# Altium PCB AngleMod V1.PcbDoc
Units mm, origin at the board's own origin, x right, y up, seen from the top; angles counter-clockwise.
Board outline 15.2 x 15.2 mm, 2 copper layers (Top Layer, Bottom Layer), stack 0.67 mm thick; 25 components, 26 nets, 100 pads, 41 vias.
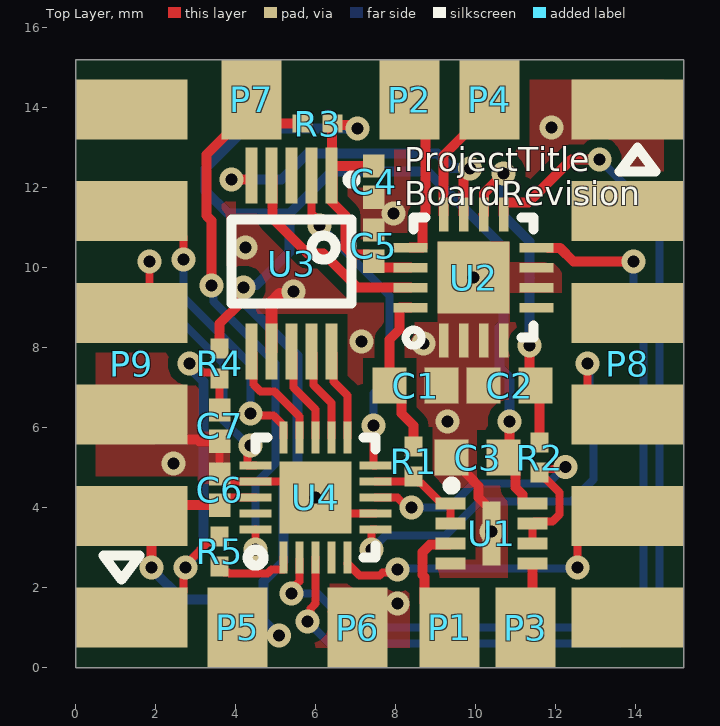
[diagram p0: Top Layer view]
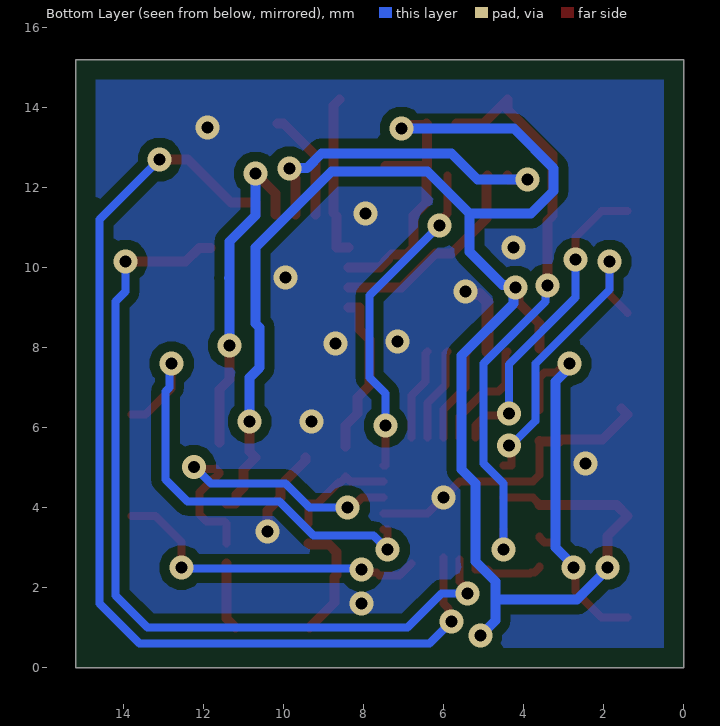
[diagram p1: Bottom Layer view, seen from below]

## Layer stack, top to bottom
Top Solder: solder mask 0.0254, SM-001, Dk 4
Top Layer: signal copper 0.035
Dielectric 1: core 0.6, Core-038, Dk 4.6
Bottom Layer: signal copper 0.035
Bottom Solder: solder mask 0.0254, SM-001, Dk 4

## Board outline
0,0 0,15.2 15.2,15.2 15.2,0

## Design rules (kind name [scope] priority, off if disabled: settings)
BoardOutlineClearance [All] p1 off: gap=0.7 ignorepadtopadclearanceinfootprint=FALSE
Clearance Polygon_Clearance [InPolygon] p1: gap=0.25 ignorepadtopadclearanceinfootprint=FALSE
Clearance [All] p2: gap=0.2 ignorepadtopadclearanceinfootprint=FALSE
ComponentClearance [All] p1: gap=0.2 collisioncheckmode=3 verticalgap=0.254 showdistances=FALSE
Height [All] p1 off: minheight=0 maxheight=25.4 prefheight=12.7
HoleSize [All] p1: absolutevalues=TRUE maxlimit=0.3 minlimit=0.3 maxpercent=80.000 minpercent=20.000
HoleToHoleClearance [All] p1: gap=0.5 allowstackedmicrovias=TRUE
MinimumSolderMaskSliver [All] p1: minsoldermaskwidth=0.08
PolygonConnect [All] p1: connectstyle=Direct reliefconductorwidth=0.254 reliefentries=4 polygonreliefangle="90 Angle" airgapwidth=0.254
RoutingVias [All] p1: holewidth=0.3 width=0.6 viastyle="Through Hole" minholewidth=0.3 minwidth=0.6 maxholewidth=0.3 maxwidth=0.6
SilkToSolderMaskClearance [IsPad] p1 off: minsilkscreentomaskgap=0.254 clearancetoexposedcopper=TRUE
SolderMaskExpansion [All] p1: expansion=0.055 istentingtop=FALSE soldermaskfromhole=TRUE
Width [All] p1: maxlimit=0.5 minlimit=0.2 preferedwidth=0.25
24 further rules are at their usual default settings.

## Components (designator, comment, footprint, x,y, rotation, side; value= is the part's Value field where it differs from the comment)
C1 "CC0603KRX7R6BB224" CX7R0603K 8.5,7.05 r180 top value=220nF
C2 "CC0603KRX7R6BB224" CX7R0603K 10.85,7.05 r0 top value=220nF
C3 "06036C105JAT2A" CX7R0603K 10.05,5.25 r0 top value=1uF
C4 "04025C104JAT2A" CX7R0402C 7.45,12.15 r90 top value=100nF
C5 "04025C104JAT2A" CX7R0402C 7.45,10.55 r270 top value=100nF
C6 "04025C104JAT2A" CX7R0402C 3.6,4.45 r270 top value=100nF
C7 "04025C104JAT2A" CX7R0402C 3.6,6.05 r90 top value=10nF
P1 "SMD Pad 1 pin" PAD_2X1.5_SQUARE 9.35,1 r90 top
P2 "SMD Pad 1 pin" PAD_2X1.5_SQUARE 8.35,14.2 r90 top
P3 "SMD Pad 1 pin" PAD_2X1.5_SQUARE 11.25,1 r90 top
P4 "SMD Pad 1 pin" PAD_2X1.5_SQUARE 10.35,14.2 r90 top
P5 "SMD Pad 1 pin" PAD_2X1.5_SQUARE 4.05,1 r90 top
P6 "SMD Pad 1 pin" PAD_2X1.5_SQUARE 7.05,1 r90 top
P7 "SMD Pad 1 pin" PAD_2X1.5_SQUARE 4.4,14.2 r270 top
P8 "TSW-106-23-F-S" TSW-106-23-F-S_SIDEA 13.8,7.6 r270 top
P9 "TSW-106-23-F-S" TSW-106-23-F-S_SIDEA 1.4,7.6 r90 top
R1 "RG1005P-472-B-T5" RT0402_C 8.45,5.15 r270 top value=4.7k
R2 "RG1005P-472-B-T5" RT0402_C 11.6,5.25 r270 top value=4.7k
R3 "TBD" RT0402_C 6.05,13.6 r0 top value=10k
R4 "TBD" RT0402_C 3.6,7.6 r90 top value=10k
R5 "TBD" RT0402_C 3.6,2.9 r90 top value=470E
U1 "TSV632IQ2T" DFN-8_2X2_0.5_C 10.4,3.35 r0 top
U2 "NX3L4053HR,115" HXQFN-16_SOT-1039-2_C 9.95,9.75 r90 top
U3 "MCP48FVB12-E/UN" MSOP-10_0.5_C 5.4,10.1 r270 top
U4 "PIC16F15245T-I/REB" VQFN-20_0.4_C 6,4.25 r90 top

## Footprints (in the part's own frame and the unit in brackets; to place one, negate y for a bottom-side part, rotate by r counter-clockwise, add the part's x,y. Pads: shape width x height; smd on the part's side, far side on the other; paste and mask are expansions set on the pad)
CX7R0402C [mm] "Chip Capacitor, 2-Leads, Body 1.00x0.50mm, IPC High Density"
  rect 0.58x0.54 smd: 1(-0.39,0) 2(0.39,0)
  body extent -0.55,-0.3 0.55,0.3, height 0.56
CX7R0603K [mm] "Chip Capacitor, 2-Leads, Body 1.60x0.81mm, IPC High Density"
  rect 0.85x0.9 smd: 1(-0.65,0) 2(0.65,0)
  body extent -0.88,-0.48 0.87,0.48, height 1.02
DFN-8_2X2_0.5_C [mm]
  rect 0.75x0.3 smd: 1(-1.025,0.75) 2(-1.025,0.25) 3(-1.025,-0.25) 4(-1.025,-0.75) 5(1.025,-0.75) 6(1.025,-0.25) 7(1.025,0.25) 8(1.025,0.75)
  rect 0.45x1.6 smd: EP(0,0)
  silkscreen extent -1.1,1.1 -0.9,1.3, body extent -1,-1 1,1, height 0.6
HXQFN-16_SOT-1039-2_C [mm] "HXQFN16 (U) plastic thermal enhanced extremely thin quad  flat package; no leads; 16 terminals, 0.5 mm pitch, 3 mm x 3  mm x 0.5 mm body"
  rect 0.85x0.24 smd paste-0.012: 1(-1.575,0.75) 2(-1.575,0.25) 3(-1.575,-0.25) 4(-1.575,-0.75) 9(1.575,-0.75) 10(1.575,-0.25) 11(1.575,0.25) 12(1.575,0.75)
  rect 0.24x0.85 smd paste-0.012: 5(-0.75,-1.575) 6(-0.25,-1.575) 7(0.25,-1.575) 8(0.75,-1.575) 13(0.75,1.575) 14(0.25,1.575) 15(-0.25,1.575) 16(-0.75,1.575)
  rect 1.8x1.8 smd paste-0.5: EP(0,0)
  silkscreen extent -1.7,-1.5 1.5,1.7, body extent -1.5,-1.5 1.5,1.5, height 0.5
MSOP-10_0.5_C [mm]
  rect 1.4x0.3 smd: 1(-2.2,1) 2(-2.2,0.5) 3(-2.2,0) 4(-2.2,-0.5) 5(-2.2,-1) 6(2.2,-1) 7(2.2,-0.5) 8(2.2,0) 9(2.2,0.5) 10(2.2,1)
  silkscreen extent -2.2,-1.5 1,1.6, body extent -1.5,-1.5 1.5,1.5, height 1.1
PAD_2X1.5_SQUARE [mm]
  rect 2x1.5 smd paste-5: 1(0,0)
RT0402_C [mm] "Chip Resistor, 2-Leads, Body 1.00x0.50mm, IPC High Density"
  rect 0.5x0.45 smd: 1(-0.375,0) 2(0.375,0)
  body extent -0.53,-0.27 0.53,0.28, height 0.4
TSW-106-23-F-S_SIDEA [mm] "Connector Header Through Hole 6 position 0.100\" (2.54mm)"
  rect 1.5x2.8 smd paste-5: 1(-6.35,0) 2(-3.81,0) 3(-1.27,0) 4(1.27,0) 5(3.81,0) 6(6.35,0)
  silkscreen extent -5.4,-0.2 -4.8,0.7, body extent -7.75,-1.21 7.62,10.1, height 1.62
VQFN-20_0.4_C [mm]
  rect 0.8x0.2 smd: 1(-1.5,0.8) 2(-1.5,0.4) 3(-1.5,0) 4(-1.5,-0.4) 5(-1.5,-0.8) 11(1.5,-0.8) 12(1.5,-0.4) 13(1.5,0) 14(1.5,0.4) 15(1.5,0.8)
  rect 0.2x0.8 smd: 6(-0.8,-1.5) 7(-0.4,-1.5) 8(0,-1.5) 9(0.4,-1.5) 10(0.8,-1.5) 16(0.8,1.5) 17(0.4,1.5) 18(0,1.5) 19(-0.4,1.5) 20(-0.8,1.5)
  rect 1.8x1.8 smd: EP(0,0)
  silkscreen extent -1.7,-1.5 1.5,1.7, body extent -1.5,-1.5 1.5,1.5, height 0.9

## Part data
C1 C2: library part kyocera-C-X7R-0603, "0.22 µF ±10% 10V Ceramic Capacitor X7R 0603 (1608 Metric)", Value2=10V, Size=0603, Type=CC0603KRX7R6BB224
C3: library part kyocera-C-X7R-0603, "SMD Capacitor", CapacitanceCode=105, Dielectric=C, ToleranceCode=J, Value2=6.3V, VoltageCode=6, MaxThicknessCode=K, Size=0603
C4 C5 C6 C7: library part kyocera-C-X7R-0402, "SMD Capacitor", CapacitanceCode=104, Dielectric=C, ToleranceCode=J, Value2=50V, VoltageCode=5, MaxThicknessCode=E, Size=0402
P1 P2 P3 P4 P5 P6 P7: "Single SMD Pad"
  P1: Name="X Axis In"
  P2: Name="X Axis Out"
  P3: Name="Y Axis In"
  P4: Name="Y Axis Out"
  P5: Name=3.3V
  P6: Name=GND
  P7: Name=Button
P8 P9: "Connector Header Through Hole 6 position 0.100\" (2.54mm)", Manufacturer 1="Samtec Inc.", Manufacturer Part Number 1=TSW-106-23-F-S, Type=TSW-106-23-F-S
R1 R2 R3 R4 R5: library part RT0402DRD0747KL, "4.7 kOhms ±0.1% 0.063W, 1/16W Chip Resistor 0402 (1005 Metric) Anti-Sulfur, Automotive AEC-Q200 Thin Film", Value2=62.5mW
  R1 R2: Type=RG1005P-472-B-T5
  R3 R4 R5: Type=TBD
U1: "General Purpose Amplifier 2 Circuit Rail-to-Rail 8-DFN (2x2)", Manufacturer 1=STMicroelectronics, Manufacturer Part Number 1=TSV632IQ2T, Type=TSV632IQ2T
U2: library part NX3L4053, "3 Circuit IC Switch 2:1 800mOhm 16-HXQFN (3x3)", Manufacturer Part Number 1="NXP USA Inc.", Manufacturer 1=NX3L4053HR,115, Type=NX3L4053HR,115
U3 U4: Manufacturer 1="Microchip Technology"
  U3: Manufacturer Part Number 1=MCP48FVB12-E/UN, Type=MCP48FVB12-E/UN
  U4: Manufacturer Part Number 1=PIC16F15245T-I/REB, Type=PIC16F15245T-I/REB

## Via types
v1: diameter 0.6, hole 0.3, Top Layer to Bottom Layer, 41 vias

## Nets (pads, with @x,y where several pads share a name; then routed paths per layer and width w, separated by ;. In a path a pad name is that pad's centre, name@x,y a point inside that pad or via, vN(x,y) a via of type N, cw(c..) or ccw(c..) an arc to the next point about the centre after c; other vN are vias at no path point)
+3.3V: C3.2 C4.2 C5.2 C6.2 P5.1 P9.2 R3.2 R4.2 U1.8 U2.14 U3.1 U4.18 | length 49.7
  Top Layer w0.2: C6.2@3.6,4.08 3.77,4.25 U4.18
  Top Layer w0.25: v1(1.9,2.5) 1.9,3.29 P9.2 1.67,4.06 C6.2 C6.2@3.6,4.08 ; R4.2 3.6,8.6 4.131,9.131 4.131,9.433 v1(4.198,9.5) ; U3.1@6.4,11.7 6.4,11.654 U3.1@6.425,11.629 ; v1(7.05,13.475) 6.955,13.475 6.861,13.57 6.455,13.57 R3.2 6.413,13.588 U3.1@6.413,12.528 ; C5.2@7.395,10.205 7.595,10.005 8.37,10.005 U2.14 ; C5.2 7.45,10.18 7.305,10.325 6.925,10.325 6.75,10.5 6.75,11.304 U3.1@6.425,11.629 ; C4.2 6.425,12.54 U3.1@6.413,12.528 ; v1(10.85,6.15) 10.85,5.4 C3.2 11,4.95 11,4.5 11.175,4.325 11.175,4.125 11.2,4.1 U1.8 ; U3.1@6.413,12.528 6.425,12.515 U3.1@6.425,11.629
  Bottom Layer w0.25: v1(1.9,2.5) 1.9,2.466 2.666,1.7 4.7,1.7 ; v1(5.081,0.8) 4.7,1.181 4.7,1.7 ; v1(7.05,13.475) 4.241,13.475 3.25,12.484 3.25,11.916 3.816,11.35 5.35,11.35 ; v1(10.85,6.15) 10.85,7.247 10.6,7.497 10.6,8.5 10.7,8.6 10.7,10.5 8.8,12.4 6.4,12.4 5.35,11.35 ; 4.7,1.7 4.7,2.15 5.2,2.65 5.2,4.6 5.55,4.95 5.55,7.8 4.252,9.098 4.252,9.447 v1(4.198,9.5) 4.265,9.567 4.522,9.567 4.936,9.981 5.35,10.395 5.35,11.35
BTN: P7.1 R3.1 U4.20 | length 14.7
  Top Layer w0.2: v1(4.5,2.95) U4.20
  Top Layer w0.25: v1(3.4,9.55) 3.4,11.172 3.275,11.297 3.275,12.825 4.4,13.95 P7.1 5,13.6 R3.1
  Bottom Layer w0.2: v1(3.4,9.55) 3.449,9.501 3.449,9.151 5,7.6 5,5.1 4.5,4.6 v1(4.5,2.95)
DAC_X: U2.15 U3.4 | length 5.2
  Top Layer w0.25: U3.4 4.925,12.275 4.925,11.225 5.8,10.35 6.2,10.35 7.05,9.5 U2.15
DAC_Y: U2.11 U3.5 | length 8.2
  Top Layer w0.25: v1(3.9,12.2) 4.375,12.2 4.4,12.225 U3.5 ; U2.11 9.7,12.23 9.854,12.385 v1(9.854,12.479)
  Bottom Layer w0.25: v1(3.9,12.2) 5.15,12.2 5.8,12.85 9.05,12.85 9.41,12.49 9.844,12.49 v1(9.854,12.479)
GND: C1.1 C2.1 C3.1 C4.1 C5.1 C6.1 C7.1 P6.1 P8.1 P9.3 U1.4 U1.EP U2.1 U2.2 U2.3 U2.4 U2.6 U2.7 U2.EP U3.7 U4.7 U4.17 U4.EP | length 12
  Top Layer w0.2: C7.1 C6.1 3.6,4.82 3.77,4.65 3.887,4.65 U4.17 5.6,4.65 v1(6,4.25) 6.4,3.85 U4.7
  Top Layer w0.25: P9.3@1.55,6.48 P9.3 2.025,5.705 3.045,5.705 3.1,5.65 3.59,5.65 C7.1 ; C3.1@9.45,5.25 9.45,5.175 9.95,4.675 9.95,4.665 10.075,4.54 10.075,4.25 10.4,3.925 v1(10.4,3.4)
  Top Layer w0.3: U3.7 4.9,9.138 5.105,9.343 5.393,9.343 v1(5.45,9.4)
  other v1: 8.05,1.6 2.45,5.1 9.3,6.15 8.7,8.1 7.15,8.15 9.95,9.75 4.25,10.5 7.95,11.35 11.9,13.5
ICSPCLK: P9.5 U4.15 | length 7.9
  Top Layer w0.2: P9.5 2.05,11.41 2.7,10.76 v1(2.7,10.2) ; v1@4.37,6.357 4.427,6.3 4.95,6.3 5.2,6.05 U4.15
  Bottom Layer w0.2: v1(2.7,10.2) 2.7,9.25 4.37,7.58 v1(4.37,6.35)
ICSPDAT: P9.4 U4.16 | length 7.9
  Top Layer w0.2: P9.4 1.85,9.32 v1(1.85,10.15) ; v1(4.37,5.55) 4.3,5.48 4.3,5.05 U4.16
  Bottom Layer w0.2: v1(1.85,10.15) 1.85,9.449 3.7,7.599 3.7,6.171 4.321,5.55 v1(4.37,5.55)
INX: P1.1 U1.3 | length 3
  Top Layer w0.25: P1.1 8.725,1.625 8.725,2.265 8.675,2.315 8.675,2.885 8.865,3.075 9.35,3.075 U1.3
INX_BUF: R1.2 U1.1 U1.2 U4.9 | length 2.7
  Top Layer w0.2: U4.9 8.325,4.65 R1.2 8.45,4.75 8.575,4.625 8.625,4.625 9.15,4.1 U1.1 U1.2
INX_FLT: C1.2 R1.1 U2.16 | length 4.1
  Top Layer w0.25: U2.16 8.105,9 8.1,8.995 8.1,8.45 7.85,8.2 C1.2 8.15,6.75 8.15,6.35 8.45,6.05 R1.1
INY: P3.1 U1.5 | length 1.7
  Top Layer w0.25: P3.1@11.2,1 11.425,1.225 U1.5
INY_BUF: R2.2 U1.6 U1.7 U4.8 | length 8.5
  Top Layer w0.2: U4.8 8.042,4.25 8.292,4 v1(8.4,4) ; U1.6 U1.7 11.475,3.65 11.924,3.65 12.1,3.826 12.1,4.374 11.749,4.725 11.725,4.725 11.6,4.85 11.6,4.879 11.695,4.973 11.702,4.966 12.196,4.966 v1(12.245,5.015)
  Bottom Layer w0.2: v1(8.4,4) 9.35,4 9.95,4.6 11.812,4.6 12.227,5.015 v1(12.245,5.015)
INY_FLT: C2.2 R2.1 U2.10 | length 8.3
  Top Layer w0.25: U2.10 10.205,11.33 10.205,11.855 v1(10.7,12.35) ; v1(11.35,8.05) 11.35,7.2 C2.2 ; C2.2@11.55,7 11.6,6.95 R2.1
  Bottom Layer w0.25: v1(10.7,12.35) 10.7,11.3 11.35,10.65 11.35,9.75 ; v1(11.35,8.05) 11.35,9.722 11.364,9.736
L\A\T\: U3.6 U4.14 | length 2.9
  Top Layer w0.2: U3.6 4.45,7.85 4.45,7.076 4.626,6.9 4.974,6.9 5.6,6.274 U4.14
M\C\L\R\: R5.1 U4.1 | length 2
  Top Layer w0.2: R5.1 3.6,2.5 3.725,2.375 3.817,2.375 3.842,2.35 4.8,2.35 4.9,2.45 5.2,2.45 U4.1
MISO: U3.8 U4.13 | length 2.4
  Top Layer w0.2: U3.8 5.45,7.85 5.45,7 6,6.45 U4.13
MOSI: U3.10 U4.11 | length 2.3
  Top Layer w0.2: U3.10 6.45,7.85 6.45,7.15 6.8,6.8 U4.11
NetC7_2: C7.2 P9.1 R4.1 R5.2 | length 10.5
  Top Layer w0.2: P9.1 2.05,1.25 2.7,1.9 2.7,2.45 v1(2.75,2.5) ; v1@2.7,2.516 3.1,2.916 3.1,2.924 3.301,3.125 3.475,3.125 3.6,3.25 R5.2 ; v1(2.85,7.6) 2.958,7.6 3.183,7.375 3.475,7.375 3.6,7.25 R4.1 C7.2
  Bottom Layer w0.25: v1@2.8,2.55 2.8,2.605 3.2,3.005 3.2,7.155 2.85,7.505 v1(2.85,7.6)
OUTX: P2.1 U2.13 | length 4.1
  Top Layer w0.25: U2.13 8.67,10.5 8.675,10.505 8.675,11.29 8.75,11.365 8.75,14.05 P2.1@8.6,14.2
OUTY: P4.1 U2.12 | length 2.8
  Top Layer w0.25: U2.12 9.2,12.8 10,13.6 P4.1@10.15,13.6
RX1: P8.4 U4.6 | length 11.7
  Top Layer w0.2: v1(7.4,2.95) 7.4,3.45 U4.6 ; v1(12.8,7.6) 12.8,6.98 13.45,6.33 P8.4
  Bottom Layer w0.2: v1(7.4,2.95) 7.75,3.3 9.25,3.3 10.1,4.15 12.4,4.15 12.95,4.7 12.95,6.9 12.85,7 12.85,7.55 v1(12.8,7.6)
S\S\1\: U3.2 U4.10 | length 8.3
  Top Layer w0.2: U3.2 5.9,11.352 6.1,11.152 v1(6.1,11.05) ; v1(7.45,6.05) 7.45,5.05 U4.10
  Bottom Layer w0.2: v1(6.1,11.05) 7.85,9.3 7.85,7.25 7.45,6.85 v1(7.45,6.05)
SCK: U3.9 U4.12 | length 2.4
  Top Layer w0.2: U3.9 5.95,7.85 5.95,7.066 6.4,6.616 U4.12
SW_X: U2.8 U4.2 | length 21.1
  Top Layer w0.2: v1(5.4,1.85) 5.4,1.958 5.6,2.158 U4.2@5.6,2.7
  Top Layer w0.25: U2.8@11.825,10.495 12.105,10.495 12.45,10.15 v1(13.95,10.15)
  Bottom Layer w0.2: v1(5.4,1.85) 6.05,1.85 6.9,1 13.4,1 14.2,1.8 14.2,9.15 13.95,9.4 v1(13.95,10.15)
SW_Y: U2.9 U4.3 | length 26
  Top Layer w0.2: v1(5.8,1.15) 5.877,1.227 5.877,1.478 6,1.601 U4.3
  Top Layer w0.25: U2.9 10.7,11.62 10.705,11.625 11.318,11.625 12.393,12.7 v1(13.1,12.7)
  Bottom Layer w0.2: v1(5.8,1.15) 6.35,0.6 13.6,0.6 14.6,1.6 14.6,11.2 v1(13.1,12.7)
TX1: P8.5 U4.5 | length 8.1
  Top Layer w0.2: U4.5@6.8,2.6 7.1,2.3 7.599,2.3 7.672,2.373 7.973,2.373 v1(8.05,2.45) ; v1(12.55,2.5) 12.55,3.14 13.2,3.79 P8.5
  Bottom Layer w0.2: v1(8.05,2.45) 8.075,2.475 12.525,2.475 v1(12.55,2.5)
pads on no net: P8.2 P8.3 P8.6 P9.6 U2.5 U3.3 U4.4 U4.19

## Polygon pours and split planes (outlines as drawn)
GND on Top Layer "GND_L01_P000" (solid, remove dead copper, pour order 0): 0.5,0.5 14.7,0.5 14.7,14.7 0.5,14.7
GND on Bottom Layer "GND_L02_P001" (solid, remove dead copper, pour order 1): 0.5,0.5 14.7,0.5 14.7,14.7 0.5,14.7

## Silkscreen, mask and mechanical layers (free items; w line width, h text height)
Top Overlay:
  text ".ProjectTitle" at 7.954,12.404 h0.6
  text ".BoardRevision" at 7.954,11.554 h0.6
Board Shape:
  the board outline again, w0.2
Margin:
  lines w0.2: 0.5,0.5 0.5,14.7 14.7,14.7 14.7,0.5 0.5,0.5
Board:
  drawing of 243 lines, arcs and shapes, not listed
  text "Layer" at 28.29,14.9 h0.8
  text "Name" at 33.888,14.9 h0.8
  text "Material" at 51.75,14.9 h0.8
  text "Thickness" at 59.881,14.9 h0.8
  text "Constant" at 68.679,14.9 h0.8
  text "Board Layer Stack" at 76.411,14.9 h0.8
  text "Top Overlay" at 33.888,13.3 h0.8
  text "Top Solder" at 33.888,11.7 h0.8
  text "SM-001" at 51.75,11.7 h0.8
  text "0.025mm" at 59.881,11.7 h0.8
  text "4" at 68.679,11.7 h0.8
  text "Top Surface Finish" at 33.888,10.1 h0.8
  text "PbSn" at 51.75,10.1 h0.8
  text "0.020mm" at 59.881,10.1 h0.8
  text "1" at 28.29,8.5 h0.8
  text "Top Layer" at 33.888,8.5 h0.8
  text "CF-004" at 51.75,8.5 h0.8
  text "0.035mm" at 59.881,8.5 h0.8
  text "Dielectric 1" at 33.888,6.9 h0.8
  text "Core-038" at 51.75,6.9 h0.8
  text "0.600mm" at 59.881,6.9 h0.8
  text "4.6" at 68.679,6.9 h0.8
  text "2" at 28.29,5.3 h0.8
  text "Bottom Layer" at 33.888,5.3 h0.8
  text "CF-004" at 51.75,5.3 h0.8
  text "0.035mm" at 59.881,5.3 h0.8
  text "Bottom Surface Finish" at 33.888,3.7 h0.8
  text "PbSn" at 51.75,3.7 h0.8
  text "0.020mm" at 59.881,3.7 h0.8
  text "Bottom Solder" at 33.888,2.1 h0.8
  text "SM-001" at 51.75,2.1 h0.8
  text "0.025mm" at 59.881,2.1 h0.8
  text "4" at 68.679,2.1 h0.8
  text "Bottom Overlay" at 33.888,0.5 h0.8
Top Designator:
  text "UART" at 26.496,5.804 h1.2 r90
  text "JTAG" at -10.204,5.604 h1.2 r90
Drill Drawing:
  lines w0.2: -4.434,26.95 -3.545,26.95 -3.545,27.839 -4.434,27.839 -4.434,26.95
  lines w0.381: -5.252,26.35 88.696,26.35 ; -5.252,28.35 88.696,28.35 ; 2.306,24.35 2.306,30.35 ; 9.504,24.35 9.504,30.35 ; 23.9,24.35 23.9,30.35 ; 30.858,24.35 30.858,30.35 ; 40.856,24.35 40.856,30.35 ; 60.983,24.35 60.983,30.35 ; 69.061,24.35 69.061,30.35 ; 79.218,24.35 79.218,30.35 ; -5.252,24.35 88.696,24.35 88.696,30.35 -5.252,30.35 -5.252,24.35
  text "Symbol" at -4.052,28.95 h0.96
  text "Count" at 2.906,28.95 h0.96
  text "Hole Size" at 10.104,28.95 h0.96
  text "Plated" at 24.5,28.95 h0.96
  text "Hole Type" at 31.458,28.95 h0.96
  text "Drill Layer Pair" at 41.456,28.95 h0.96
  text "Via/Pad" at 61.583,28.95 h0.96
  text "Pad Shape" at 69.661,28.95 h0.96
  text "Template" at 79.818,28.95 h0.96
  text "41" at 2.906,26.95 h0.8
  text "11.81mil (0.300mm)" at 10.104,26.95 h0.8
  text "PTH" at 24.5,26.95 h0.8
  text "Round" at 31.458,26.95 h0.8
  text "Top Layer - Bottom Layer" at 41.456,26.95 h0.8
  text "Via" at 61.583,26.95 h0.8
  text "Rounded" at 69.661,26.95 h0.8
  text "(Mixed)" at 79.818,26.95 h0.8
  text "41 Total" at 2.906,24.95 h0.8
Pads:
  region: 9.1,13.2 9.1,15.2 7.6,15.2 7.6,13.2
  region: 11.1,13.2 11.1,15.2 9.6,15.2 9.6,13.2
  region: 12,0 12,2 10.5,2 10.5,0
  region: 7.8,0 7.8,2 6.3,2 6.3,0
  region: 10.1,0 10.1,2 8.6,2 8.6,0
  region: 4.8,0 4.8,2 3.3,2 3.3,0
  region: 5.15,13.2 5.15,15.2 3.65,15.2 3.65,13.2

## Dimensions
15.2,0 to 15.2,15.2 on Dimensions
0,0 to 15.2,0 on Dimensions

## Text inside footprints (layer, text, board x,y; h text height)
P8: Top Placement Guide (Mech7) "Board Edge" at 16.067,16.3 h0.8 r270
P9: Top Placement Guide (Mech7) "Board Edge" at -0.867,-1.1 h0.8 r90